# Altium PCB roneCPUBoard-v8.PcbDoc (part 1 of 3)
Units mil, origin at the board's own origin, x right, y up, seen from the top; angles counter-clockwise.
Board outline 3919.58 x 3919.51 mil, 2 copper layers (Top Layer, Bottom Layer); 146 components, 122 nets, 569 pads, 329 vias.
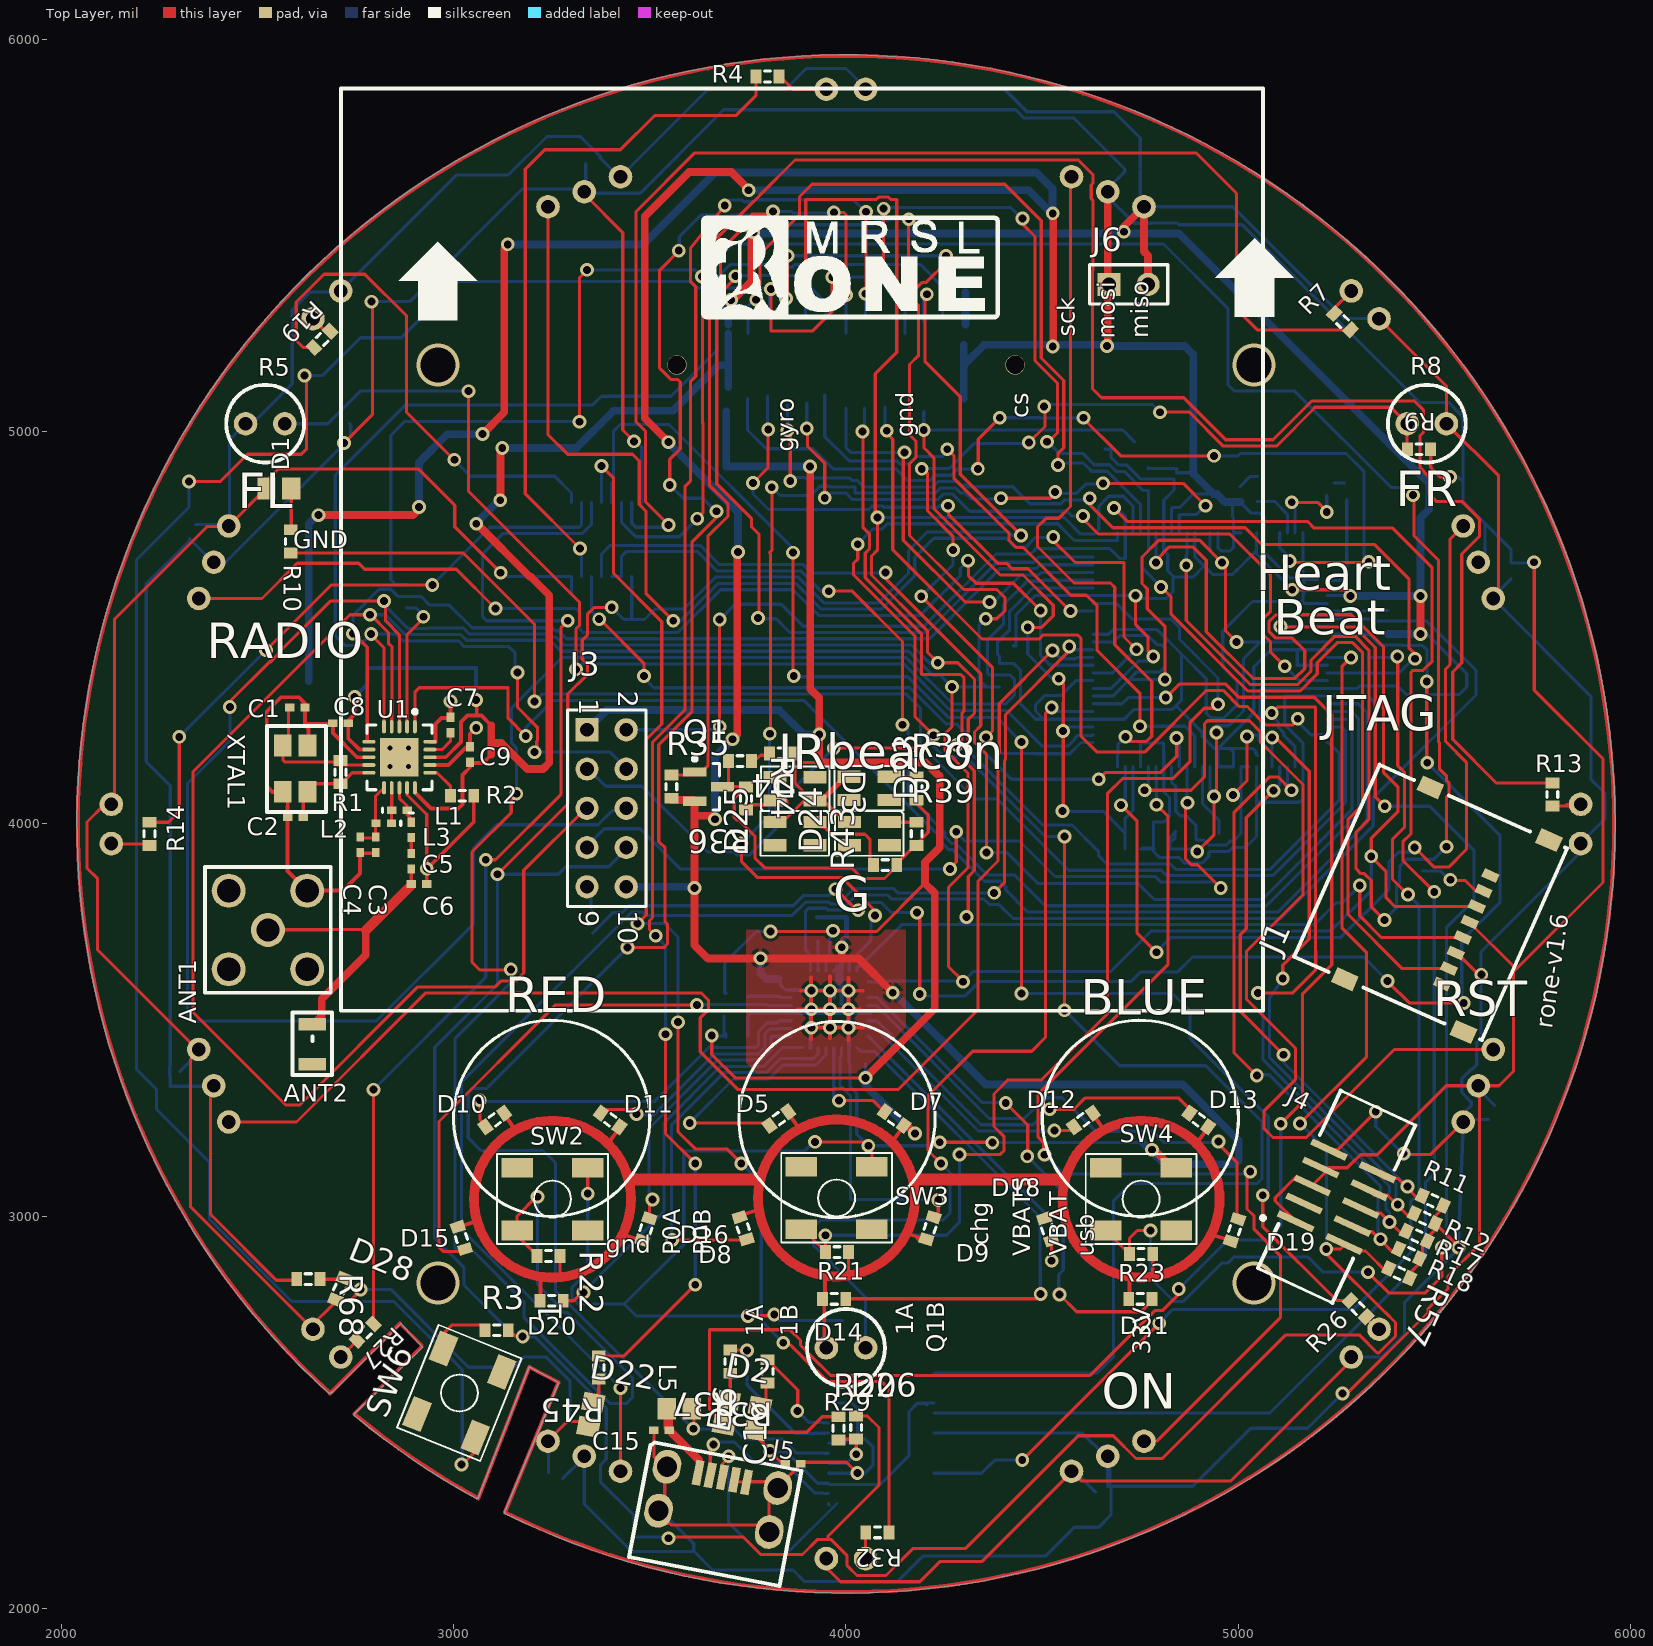
[diagram p0: Top Layer view]
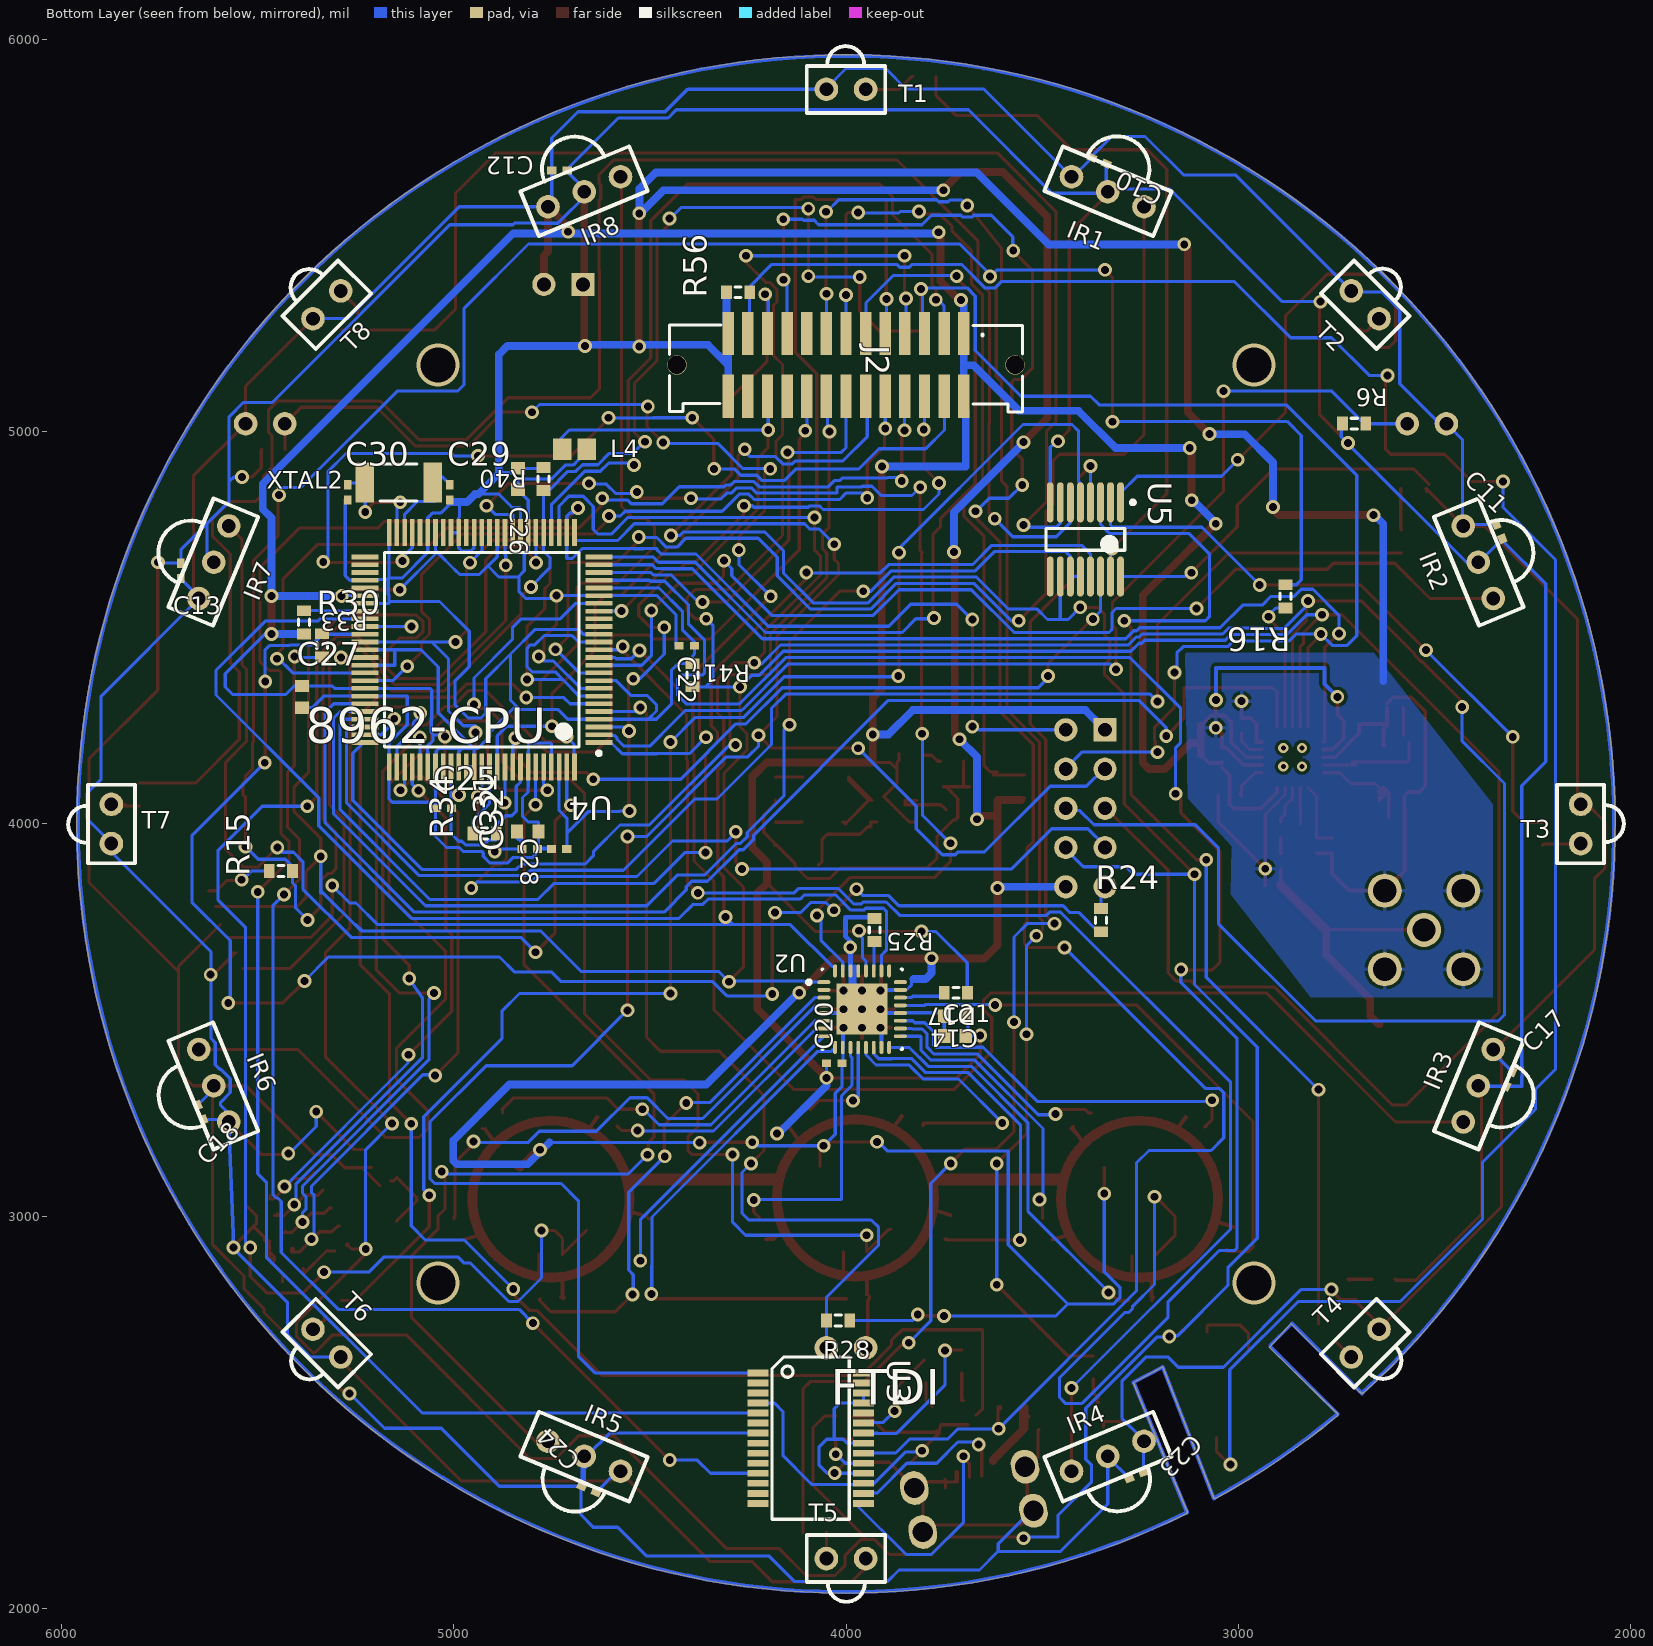
[diagram p1: Bottom Layer view, seen from below]

## Layer stack, top to bottom
Top Layer: signal copper 1.4
Dielectric: dielectric 12.6, FR-4, Dk 4.8
Bottom Layer: signal copper 1.4

## Board outline
2748.8,2491.14 cw(c2752,2495) 2750.05,2499.62 cw(c2754.57,2497.44) 2751.08,2501.04 2921.02,2666.21 2865.87,2726.78 2693.05,2553.95 cw(c2689.5,2557.5) 2689.65,2552.49 cw(c2684.81,2553.79) 2681.44,2550.08 cw(c4000,4000) 5959.81,4000 cw(c4000,4000) 3132.78,2242.5 cw(c3135,2247) 3131.48,2250.58 3267.62,2576.73 3192.75,2616.8 3064.33,2286.32 cw(c3059.66,2288.13) 3064.09,2285.79 cw(c3059.09,2286.17) 3056.68,2281.77 cw(c4000,4000)

## Design rules (kind name [scope] priority, off if disabled: settings)
Clearance [All] p1: gap=8
PolygonConnect [All] p1: connectstyle=Relief reliefconductorwidth=10 reliefentries=4 polygonreliefangle="90 Angle"
RoomDefinition SoundChip-ProtoHeader [InComponentClass('SoundChip-ProtoHeader')] p1: confinementstyle=ConfineIn formatcopy=TRUE lockcomponents=FALSE outline 6005,2266 6223,2266 6223,3027 6005,3027
RoomDefinition LightSensorsButtons [InComponentClass('LightSensorsButtons')] p2: confinementstyle=ConfineIn formatcopy=TRUE lockcomponents=FALSE outline 0,0 2000,0 2000,1000 0,1000
RoomDefinition USB_Headers [InComponentClass('USB_Headers')] p3: confinementstyle=ConfineIn formatcopy=TRUE lockcomponents=FALSE outline 6005,1995 6426,1995 6426,2205 6005,2205
RoomDefinition Radio [InComponentClass('Radio')] p4: confinementstyle=ConfineIn formatcopy=TRUE lockcomponents=FALSE outline 0,0 2000,0 2000,1000 0,1000
RoomDefinition LEDs [InComponentClass('LEDs')] p5: confinementstyle=ConfineIn formatcopy=TRUE lockcomponents=FALSE outline 0,0 2000,0 2000,1000 0,1000
RoomDefinition IRComms [InComponentClass('IRComms')] p6: confinementstyle=ConfineIn formatcopy=TRUE lockcomponents=FALSE outline 0,0 2000,0 2000,1000 0,1000
RoomDefinition CPU [InComponentClass('CPU')] p7: confinementstyle=ConfineIn formatcopy=TRUE lockcomponents=FALSE outline 6005,2000 6196,2000 6196,2186 6005,2186
RoutingVias [All] p1: holewidth=20 width=35 viastyle="Through Hole" minholewidth=20 minwidth=35 maxholewidth=20 maxwidth=35
SMDNeckDown [All] p1: percent=400.000
SilkscreenOverComponentPads [All] p1: minsilkscreentomaskgap=10
SolderMaskExpansion [All] p1: expansion=4
Width "Schematic Width Constraint_5" [InNet('NetC15_2')] p1: maxlimit=20 minlimit=10 preferedwidth=10 minimp=50.000000 maximp=50.000000 favimp=50.000000
Width [All] p2: maxlimit=8 minlimit=8 preferedwidth=8
27 further rules are at their usual default settings.

## Classes and differential pairs
component class USB_Headers: C15 C16 D2 D6 D22 D26 J1 J2 J5 L5 Q? R20 R31 R37 R45 U3 VDDC
component class LightSensorsButtons: R5 R6 R8 R9 R21 R22 R23 R28 R29 SW2 SW3 SW4
component class IRComms: C10 C11 C12 C13 C17 C18 C23 C24 D3 D4 D23 D24 D25 IR1 IR2 IR3 IR4 IR5 IR6 IR7 IR8 Q1 R4 R7 R13 R14 R19 R26 R27 R32 R35 R36 R38 R39 R43 R44 T1 T2 T3 T4 T5 T6 T7 T8 U5 U9 U10
component class CPU: C22 C25 C26 C27 C28 C29 C30 C31 C32 D1 D28 D? I2C IR_BEACON J4 J6 L4 "LED1 Power" "LED2 USB" "LED-H Blinky" LEDs R3 R10 R11 R12 R15 R16 R17 R18 R24 R30 R33 R34 R40 R41 R56 R57 R68 R? RST SPI SW6 SW? SW_RED U0 U4 XTAL2 "XTAL 1"
component class LEDs: C14 C20 C21 D5 D7 D8 D9 D10 D11 D12 D13 D14 D15 D16 D17 D18 D19 D20 D21 R25 TP? U2
component class Radio: ANT1 Ant1 ANT2 C1 C2 C3 C4 C5 C6 C7 C8 C9 C? L1 L2 L3 R1 R2 U1 XTAL1
component class SoundChip-ProtoHeader: J3

## Components (designator, comment, footprint, x,y, rotation, side; value= is the part's Value field where it differs from the comment)
ANT1 "Ant" AntennaSMA 2527,3730 r90 top
ANT2 "Antenna" antenna 2640,3490 r0 top
C1 "Cap Semi" CAPC1005L 2602,4297 r180 top
C2 "Cap Semi" CAPC1005L 2597,4017 r0 top
C3 "Cap Semi" CAPC1005L 2802,3947 r90 top
C4 "Cap Semi" CAPC1005L 2762,3947 r90 top
C5 "Cap Semi" CAPC1005L 2892,3905 r90 top
C6 "Cap Semi" CAPC1005L 2912,3847 r180 top
C7 "Cap Semi" CAPC1005L 2992,4252 r270 top
C8 "Cap Semi" CAPC1005L 2712,4257 r0 top
C9 "Cap Semi" CAPC1005L 3042,4177 r270 top
C10 "Cap Semi" CAPC1005L 3355,5690 r22.5 bottom
C11 "Cap Semi" CAPC1005L 2335,4745 r67.5 bottom
C12 "Cap Semi" CAPC1005L 4730,5665 r0 bottom
C13 "Cap Semi" CAPC1005L 5695,4645 r270 bottom
C14 "Cap Semi" CAPC1608L 3722,3510 r180 bottom
C15 "" CAPC1005L 3530,2455 r0 top
C16 "" CAPC1005L 3865,2370 r180 top
C17 "Cap Semi" CAPC1005L 2310,3350 r112.5 bottom
C18 "Cap Semi" CAPC1005L 5645,3265 r247.5 bottom
C20 "Cap Semi" CAPC1005L 4030,3390 r0 bottom
C21 "Cap Semi" CAPC1608L 3722,3460 r180 bottom
C22 "Cap Semi" CAPC1005L 4406,4454 r0 bottom
C23 "Cap Semi" CAPC1005L 3260,2340 r157.5 bottom
C24 "Cap Semi" CAPC1005L 4655,2305 r202.5 bottom
C25 "Cap Semi" CAPC1005L 5025,4040 r180 bottom
C26 "Cap Semi" CAPC1608L 4836,4879 r270 bottom
C27 "Cap Semi" CAPC1608L 5386,4324 r90 bottom
C28 "Cap Semi" CAPC1005L 4731,3936 r180 bottom
C29 "Cap Semi" CAPC1005L 5010,4845 r90 bottom
C30 "Cap Semi" CAPC1005L 5270,4845 r90 bottom
C31 "Cap Semi" CAPC1608L 4811,3981 r0 bottom
C32 "Cap Semi" CAPC1005L 4806,3936 r0 bottom
D1 "heartbeat(white)" INDC2012L 2555,4855 r0 top
D2 "RXLED" INDC2012L 3695,2500 r79.1 top
D3 "IRBeacon" IRBeacon 3870,4090 r270 top
D4 "BEACON_PILOT" SurfaceMount(603) 3835,4180 r180 top
D5 "green" SurfaceMount(603) 3829,3249 r216 top
D6 "TXLED" INDC2012L 3775,2485 r79.1 top
D7 "green" SurfaceMount(603) 4123,3249 r144 top
D8 "green" SurfaceMount(603) 3738,2970 r288 top
D9 "green" SurfaceMount(603) 4214,2970 r72 top
D10 "red" SurfaceMount(603) 3105,3246 r216 top
D11 "red" SurfaceMount(603) 3399,3246 r144 top
D12 "blue" SurfaceMount(603) 4605,3246 r216 top
D13 "blue" SurfaceMount(603) 4899,3246 r144 top
D14 "green" SurfaceMount(603) 3970,2790 r0 top
D15 "red" SurfaceMount(603) 3020,2945 r288 top
D16 "red" SurfaceMount(603) 3490,2967 r72 top
D17 "extra" SurfaceMount(603) 3720,3570 r0 bottom
D18 "blue" SurfaceMount(603) 4514,2967 r288 top
D19 "blue" SurfaceMount(603) 4990,2965 r72 top
D20 "red" SurfaceMount(603) 3250,2785 r0 top
D21 "blue" SurfaceMount(603) 4750,2790 r0 top
D22 "Charge" INDC2012L 3350,2495 r79.1 top
D23 "IRBeacon" IRBeacon 4059,4090 r90 top
D24 "IRBeacon" IRBeacon 4060,3975 r90 top
D25 "IRBeacon" IRBeacon 3870,3975 r90 top
D26 "DIODE" SurfaceMount(603) 4026,2462 r90 top
D28 "LED" SurfaceMount(603) 2710,2815 r68 top
IR1 "GP1UX31QS" GP1UX31QS 3333,5611 r292.5 bottom
IR2 "GP1UX31QS" GP1UX31QS 2389,4667 r337.5 bottom
IR3 "GP1UX31QS" GP1UX31QS 2389,3333 r22.5 bottom
IR4 "GP1UX31QS" GP1UX31QS 3333,2389 r67.5 bottom
IR5 "GP1UX31QS" GP1UX31QS 4667,2389 r112.5 bottom
IR6 "GP1UX31QS" GP1UX31QS 5611,3333 r157.5 bottom
IR7 "GP1UX31QS" GP1UX31QS 5611,4667 r202.5 bottom
IR8 "GP1UX31QS" GP1UX31QS 4667,5611 r247.5 bottom
J1 "Micro_SD" MICRO_SD 5490,3800 r66 top
J2 "HCOMM/MOT" "HeaderSM 13x2" 4000,5170 r270 bottom locked
J3 "sound chip header" HDR2X5 3340,4240 r270 top
J4 "JTAG" JTAG-10 5250,3050 r245 top
J5 "USB" "USB Minib (thru-hole)" 3685,2335 r79.1 top
J6 "Header 2" HDR1X2 4670,5375 r0 top
L1 "Inductor" INDC1005AL 2862,4035 r0 top
L2 "Inductor" INDC1005AL 2822,4002 r180 top
L3 "Inductor" INDC1005AL 2892,3985 r270 top
L4 "Inductor" INDC2012L 4692,4955 r180 bottom
L5 "Inductor" INDC2012L 3575,2510 r0 top
Q1 "Mosfet" SOT-23 3650,4095 r0 top
R1 "Res3" RESC1608L 2712,4132 r270 top
R2 "Res3" RESC1608L 3022,4072 r180 top
R3 "Res3" RESC1608L 3110,2710 r0 top
R4 "Res3" RESC1608L 3800,5905 r180 top
R5 "photoresistor" photoresistor 2520,5020 r270 top
R6 "Res3" RESC1608L 2705,5020 r0 bottom
R7 "Res3" RESC1608L 5265,5280 r315 top
R8 "photoresistor" photoresistor 5480,5020 r90 top
R9 "Res3" RESC1608L 5460,4955 r0 top
R10 "Res3" RESC1608L 2585,4720 r90 top
R11 "Res3" RESC1608L 5495,3040 r335 top
R12 "Res3" RESC1608L 5475,2995 r335 top
R13 "Res3" RESC1608L 5800,4075 r90 top
R14 "Res3" RESC1608L 2225,3975 r90 top
R15 "Res3" RESC1608L 5440,3880 r0 bottom
R16 "Res3" RESC1608L 2880,4580 r270 bottom
R17 "Res3" RESC1608L 5455,2950 r335 top
R18 "Res3" RESC1608L 5435,2905 r335 top
R19 "Res3" RESC1608L 2665,5235 r225 top
R20 "Res3" RESC1608L 3981,2460 r270 top
R21 "Res3" RESC1608L 3977,2909 r0 top
R22 "Res3" RESC1608L 3242,2899 r0 top
R23 "Res3" RESC1608L 4752,2904 r0 top
R24 "Res3" RESC1608L 3350,3755 r90 bottom
R25 "Res3" RESC1608L 3927,3730 r270 bottom
R26 "Res3" RESC1608L 5305,2765 r135 top
R27 "Res3" RESC1608L 2775,2705 r45 top
R28 "Res3" RESC1608L 4020,2735 r180 bottom
R29 "photoresistor" photoresistor 4000,2665 r270 top
R30 "" RESC1608L 5335,4455 r270 bottom
R31 "" RESC1608L 3800,2605 r270 top
R32 "Res3" RESC1608L 4080,2195 r0 top
R33 "Res3" RESC1608L 5381,4514 r270 bottom
R34 "Res3" RESC1608L 4921,3976 r0 bottom
R35 "Res3" RESC1608L 3555,4095 r90 top
R36 "Res3" RESC1608L 3745,4065 r270 top
R37 "" RESC1608L 3705,2630 r270 top
R38 "Res3" RESC1608L 4180,4090 r90 top
R39 "Res3" RESC1608L 4180,3975 r90 top
R40 "Res3" RESC1608L 4771,4879 r270 bottom
R41 "Res3" RESC1608L 4391,4379 r270 bottom
R43 "Res3" RESC1608L 4100,3895 r180 top
R44 "Res3" RESC1608L 3730,4160 r0 top
R45 "Res3" RESC1608L 3370,2615 r270 top
R56 "Res3" RESC1608L 4275,5355 r0 bottom
R57 "Res3" RESC1608L 5410,2855 r335 top
R68 "Res3" RESC1608L 2630,2840 r0 top
SW2 "SW_RED" SwitchTall-TL330 3252,3044 r0 top
SW3 "SW_GREEN" SwitchTall-TL330 3976,3047 r0 top
SW4 "SW_BLUE" SwitchTall-TL330 4752,3044 r0 top
SW6 "PWR_BUTTON" SwitchTall-TL330 3015,2550 r68 top
T1 "LN54" LN54 4000,5872 r270 bottom
T2 "LN54" LN54 2677,5323 r315 bottom
T3 "LN54" LN54 2128,4000 r0 bottom
T4 "LN54" LN54 2677,2677 r45 bottom
T5 "LN54" LN54 4000,2128 r90 bottom
T6 "LN54" LN54 5323,2677 r135 bottom
T7 "LN54" LN54 5872,4000 r180 bottom locked
T8 "LN54" LN54 5323,5323 r225 bottom
U1 "nRF24L01P" QFN-20 2862,4170 r270 top
U2 "Allegro6285" QFN-32 3959,3528 r180 bottom
U3 "FT232RL" SSOP-28 4090,2435 r270 bottom locked
U4 "LM3S8962" LQFP-100 4928,4444 r0 bottom locked
U5 "SN74AHCT595" TSOP65P640X120-16N 3390,4725 r270 bottom
XTAL1 "RADIO CRYSTAL" RadioCrystal 2565,4200 r270 top
XTAL2 "8 MHz" RESC5025L 5140,4870 r0 bottom

## Footprints (in the part's own frame and the unit in brackets; to place one, negate y for a bottom-side part, rotate by r counter-clockwise, add the part's x,y. Pads: shape width x height; smd on the part's side, far side on the other; paste and mask are expansions set on the pad)
antenna [mm] "Radio Antenna"
  rect 1.8x0.8 smd: 1(0,0) 2(0,-2.6)
  silkscreen extent -1.27,-3.3 1.27,0.76
AntennaSMA [mm] "antenna for radios , tyco 108-11200"
  round 2.2 hole 1.511: 1(0,0) 2(-2.54,2.54) 3(2.54,2.54) 4(2.54,-2.54) 5(-2.54,-2.54)
  silkscreen extent -4.06,-4.06 4.06,4.06
CAPC1005L [mm] "Chip Capacitor, Body 1.0x0.5mm, IPC High Density"
  rect 0.6x0.5 smd: 1(-0.5,0) 2(0.5,0)
  body extent -0.55,-0.3 0.55,0.3, height 1.3
CAPC1608L [mm] "Chip Capacitor, Body 1.6x0.8mm, IPC High Density"
  rect 0.8x0.9 smd: 1(-0.7,0) 2(0.7,0)
  body extent -0.87,-0.48 0.87,0.48, height 1.3
GP1UX31QS [mil]
  round 60 hole 35: 1(0,100) 2(0,0) 3(0,-100)
  silkscreen extent -146,-150 60,150
HDR1X2 [mm] "Connector; Header; 2 Position"
  rect 1.5x1.5 hole 0.9: 1(0,0)
  round 1.5 hole 0.9: 2(2.54,0)
  silkscreen extent -1.27,-1.27 3.81,1.27
HDR2X5 [mm] "Connector; Header; 5x2 Position"
  rect 1.5x1.5 hole 0.9: 1(0,0)
  round 1.5 hole 0.9: 2(0,2.54) 3(2.54,0) 4(2.54,2.54) 5(5.08,0) 6(5.08,2.54) 7(7.62,0) 8(7.62,2.54) 9(10.16,0) 10(10.16,2.54)
  silkscreen extent -1.27,-1.27 11.43,3.81
"HeaderSM 13x2" [mm]
  rect 2.795x0.74 smd: 1(-2.033,7.62) 2(2.033,7.62) 3(-2.033,6.35) 4(2.033,6.35) 5(-2.033,5.08) 6(2.033,5.08) 7(-2.033,3.81) 8(2.033,3.81) 9(-2.033,2.54) 10(2.033,2.54) 11(-2.033,1.27) 12(2.033,1.27) 13(-2.033,0) 14(2.033,0) 15(-2.033,-1.27) 16(2.033,-1.27) 17(-2.033,-2.54) 18(2.033,-2.54) 19(-2.033,-3.81) 20(2.033,-3.81) 21(-2.033,-5.08) 22(2.033,-5.08) 23(-2.033,-6.35) 24(2.033,-6.35) 25(-2.033,-7.62) 26(2.033,-7.62)
  round 1.27 hole 1.19: c1(0,10.948) c2(0,-10.948)
  silkscreen extent -2.59,-11.43 3.06,11.43
INDC1005AL [mm] "Chip Inductor, Body 1.0x0.5mm, IPC High Density"
  rect 0.6x0.5 smd: 1(-0.5,0) 2(0.5,0)
  silkscreen extent -1.1,-0.15 -1.1,0.15, body extent -0.55,-0.3 0.55,0.3, height 0.55
INDC2012L [mm] "Chip Inductor, Body 2.0x1.2mm, IPC High Density"
  rect 1.2x1.4 smd: 1(-0.8,0) 2(0.8,0)
  body extent -1.1,-0.7 1.1,0.7, height 0.55
IRBeacon [mm]
  rect 0.8x1.5 smd: 1(-0.738,1.3) 2(0.762,-1.3) 3(-0.738,-1.3) 4(0.762,1.3)
  silkscreen extent -1.42,-2.21 1.46,2.24
JTAG-10 [mm] "Connector, Socket Strip, Double Row, SMT, 20 Position, Vertical, Pitch 2mm, Body 20 x 4 mm (LxW)"
  rect 0.44x2.5 smd: 1(-2.56,-1.73) 2(-2.56,1.73) 3(-1.28,-1.73) 4(-1.28,1.73) 5(0,-1.73) 6(0,1.73) 7(1.28,-1.73) 8(1.28,1.73) 9(2.56,-1.73) 10(2.56,1.73)
  silkscreen extent -6.35,-3.86 6.35,2.67, body extent -6.35,-2.01 6.35,2.03, height 3.56
LN54 [mil]
  round 60 hole 35: 1(0,50) 2(0,-50)
  silkscreen extent -110,-100 60,100
LQFP-100 [mm] "100-Pin LQFP Package"
  rect 1.75x0.3 smd: 1(-7.575,6) 2(-7.575,5.5) 3(-7.575,5) 4(-7.575,4.5) 5(-7.575,4) 6(-7.575,3.5) 7(-7.575,3) 8(-7.575,2.5) 9(-7.575,2) 10(-7.575,1.5) 11(-7.575,1) 12(-7.575,0.5) 13(-7.575,0) 14(-7.575,-0.5) 15(-7.575,-1) 16(-7.575,-1.5) 17(-7.575,-2) 18(-7.575,-2.5) 19(-7.575,-3) 20(-7.575,-3.5) 21(-7.575,-4) 22(-7.575,-4.5) 23(-7.575,-5) 24(-7.575,-5.5) 25(-7.575,-6) 51(7.575,-6) 52(7.575,-5.5) 53(7.575,-5) 54(7.575,-4.5) 55(7.575,-4) 56(7.575,-3.5) 57(7.575,-3) 58(7.575,-2.5) 59(7.575,-2) 60(7.575,-1.5) 61(7.575,-1) 62(7.575,-0.5) 63(7.575,0) 64(7.575,0.5) 65(7.575,1) 66(7.575,1.5) 67(7.575,2) 68(7.575,2.5) 69(7.575,3) 70(7.575,3.5) 71(7.575,4) 72(7.575,4.5) 73(7.575,5) 74(7.575,5.5) 75(7.575,6)
  rect 0.3x1.75 smd: 26(-6,-7.575) 27(-5.5,-7.575) 28(-5,-7.575) 29(-4.5,-7.575) 30(-4,-7.575) 31(-3.5,-7.575) 32(-3,-7.575) 33(-2.5,-7.575) 34(-2,-7.575) 35(-1.5,-7.575) 36(-1,-7.575) 37(-0.5,-7.575) 38(0,-7.575) 39(0.5,-7.575) 40(1,-7.575) 41(1.5,-7.575) 42(2,-7.575) 43(2.5,-7.575) 44(3,-7.575) 45(3.5,-7.575) 46(4,-7.575) 47(4.5,-7.575) 48(5,-7.575) 49(5.5,-7.575) 50(6,-7.575) 76(6,7.575) 77(5.5,7.575) 78(5,7.575) 79(4.5,7.575) 80(4,7.575) 81(3.5,7.575) 82(3,7.575) 83(2.5,7.575) 84(2,7.575) 85(1.5,7.575) 86(1,7.575) 87(0.5,7.575) 88(0,7.575) 89(-0.5,7.575) 90(-1,7.575) 91(-1.5,7.575) 92(-2,7.575) 93(-2.5,7.575) 94(-3,7.575) 95(-3.5,7.575) 96(-4,7.575) 97(-4.5,7.575) 98(-5,7.575) 99(-5.5,7.575) 100(-6,7.575)
  silkscreen extent -7.7,-6.3 6.3,6.82, body extent -7,-7 7,7, height 1.6
MICRO_SD [mm]
  rect 0.6x1.05 smd: 1(3.17,-2.82) 2(2.07,-2.82) 3(0.97,-2.82) 4(-0.13,-2.82) 5(-1.23,-2.82) 6(-2.33,-2.82) 7(-3.43,-2.82) 8(-4.53,-2.82)
  rect 1.05x1.5 smd: ""(-6.8,-5.35) ""(-6.8,3.05) ""(6.8,-5.35) ""(6.8,3.05)
  silkscreen extent -6.8,-6.65 6.8,6.65
photoresistor [mil]
  round 60 hole 35: 1(0,50) 2(0,-50)
  silkscreen extent -99,-99 99,99
QFN-20 [mm] "QFN, 20-Leads, Body 4.2x4.2mm (max), Pitch 0.50mm, IPC Medium Density"
  oval 0.85x0.25 smd: 1(-1.975,1) 2(-1.975,0.5) 3(-1.975,0) 4(-1.975,-0.5) 5(-1.975,-1) 11(1.975,-1) 12(1.975,-0.5) 13(1.975,0) 14(1.975,0.5) 15(1.975,1)
  oval 0.25x0.85 smd: 6(-1,-1.975) 7(-0.5,-1.975) 8(0,-1.975) 9(0.5,-1.975) 10(1,-1.975) 16(1,1.975) 17(0.5,1.975) 18(0,1.975) 19(-0.5,1.975) 20(-1,1.975)
  rect 2.5x2.5 smd: 21(0,0)
  silkscreen extent -3.07,-2.1 2.1,2.1, body extent -2.07,-2.07 2.07,2.07, height 0.8
QFN-32 [mm] "QFN, 32-Leads, Body 5.2x5.2mm (max), Pitch 0.50mm, IPC Medium Density"
  oval 0.85x0.25 smd: 1(-2.475,1.75) 2(-2.475,1.25) 3(-2.475,0.75) 4(-2.475,0.25) 5(-2.475,-0.25) 6(-2.475,-0.75) 7(-2.475,-1.25) 8(-2.475,-1.75) 17(2.475,-1.75) 18(2.475,-1.25) 19(2.475,-0.75) 20(2.475,-0.25) 21(2.475,0.25) 22(2.475,0.75) 23(2.475,1.25) 24(2.475,1.75)
  oval 0.25x0.85 smd: 9(-1.75,-2.475) 10(-1.25,-2.475) 11(-0.75,-2.475) 12(-0.25,-2.475) 13(0.25,-2.475) 14(0.75,-2.475) 15(1.25,-2.475) 16(1.75,-2.475) 25(1.75,2.475) 26(1.25,2.475) 27(0.75,2.475) 28(0.25,2.475) 29(-0.25,2.475) 30(-0.75,2.475) 31(-1.25,2.475) 32(-1.75,2.475)
  rect 3.3x3.3 smd: 33(0,0)
  silkscreen extent -3.57,-2.6 2.6,2.6, body extent -2.57,-2.58 2.58,2.57, height 1
RadioCrystal [mm] "Crystal for radio"
  rect 1.4x1.15 smd: 1(0,0) 2(3,0) 3(3,1.6) 4(0,1.6)
  silkscreen extent -1.27,-1.02 4.32,2.79
RESC1608L [mm] "Chip Resistor, Body 1.6x0.8mm, IPC High Density"
  rect 0.7x0.9 smd: 1(-0.75,0) 2(0.75,0)
  silkscreen extent -0.2,-0.35 0.2,0.35, body extent -0.85,-0.48 0.85,0.48, height 0.9
RESC5025L [mm] "Chip Resistor, Body 5.0x2.5mm, IPC High Density"
  rect 1.2x2.6 smd: 1(-2.2,0) 2(2.2,0)
  silkscreen extent -1.2,-1.2 1.2,1.2, body extent -2.58,-1.33 2.58,1.33, height 0.9
SOT-23 [mm] "SOT23, 3-Leads, Body 3.0x2.5mm (max), Pitch 0.95mm, IPC Medium Density"
  rect 1.5x0.6 smd: 1(-0.9,0.95) 2(-0.9,-0.95) 3(0.9,0)
  silkscreen extent -1.02,-1.5 0.7,1.92, body extent -0.7,-1.5 0.7,1.5, height 1.2
SSOP-28 [mm]
  rect 0.44x1.37 smd: 1(-4.225,-3.415) 2(-3.575,-3.415) 3(-2.925,-3.415) 4(-2.275,-3.415) 5(-1.625,-3.415) 6(-0.975,-3.415) 7(-0.325,-3.415) 8(0.325,-3.415) 9(0.975,-3.415) 10(1.625,-3.415) 11(2.275,-3.415) 12(2.925,-3.415) 13(3.575,-3.415) 14(4.225,-3.415) 15(4.225,3.415) 16(3.575,3.415) 17(2.925,3.415) 18(2.275,3.415) 19(1.625,3.415) 20(0.975,3.415) 21(0.325,3.415) 22(-0.325,3.415) 23(-0.975,3.415) 24(-1.625,3.415) 25(-2.275,3.415) 26(-2.925,3.415) 27(-3.575,3.415) 28(-4.225,3.415)
  silkscreen extent -5.25,-2.5 5.25,2.5
SurfaceMount(603) [mm]
  rect 0.7x0.9 smd: 1(-0.75,0) 2(0.75,0)
  silkscreen extent -0.2,-0.35 0.2,0.35, body extent -0.85,-0.48 0.85,0.48, height 0.9
SwitchTall-TL330 [mil] "Small SMDTall Tact Switch E-Switch TL330"
  rect 80x50 smd: 1(-90,80) 2(90,80) 3(-90,-80) 4(90,-80)
  silkscreen extent -141,-114 141,115
TSOP65P640X120-16N [mm] "TSOP, 16-Leads, Body 5.1x4.5mm (max), Pitch 0.65mm, IPC Medium Density"
  oval 2.6x0.445 smd: 1(-2.4,2.275) 2(-2.4,1.625) 3(-2.4,0.975) 4(-2.4,0.325) 5(-2.4,-0.325) 6(-2.4,-0.975) 7(-2.4,-1.625) 8(-2.4,-2.275) 9(2.4,-2.275) 10(2.4,-1.625) 11(2.4,-0.975) 12(2.4,-0.325) 13(2.4,0.325) 14(2.4,0.975) 15(2.4,1.625) 16(2.4,2.275)
  silkscreen extent -2.52,-2.55 0.7,3.2, body extent -2.25,-2.55 2.25,2.55, height 1.2
"USB Minib (thru-hole)" [mm]
  rect 1.65x0.55 smd: 1(0,1.6) 2(0,0.8) 3(0,0) 4(0,-0.8) 5(0,-1.6)
  oval 2.2x1.8 hole 1.321: 6(0,3.65) 7(-2.9,3.65) 8(-2.9,-3.65) 9(0,-3.65)
  silkscreen extent -6.2,-4.95 1.39,4.95

## Part data
ANT1: library part AntennaConn
C1 C2 C3 C4 C5 C6 C7 C8 C9 C10 C11 C12 C13 C14 C17 C18 C20 C21 C22 C23 C24 C25 C26 C27 C28 C29 C30 C31 C32: "Capacitor (Semiconductor SIM Model)"
C15 C16: library part Cap, "Capacitor"
D1 D2 D6 D22: library part LED2, "Typical RED, GREEN, YELLOW, AMBER GaAs LED"
D4 D5 D7 D8 D9 D10 D11 D12 D13 D14 D15 D16 D17 D18 D19 D20 D21: library part LED
J1: library part MICRO_SD
J2: library part HCOMM/HMOT, "Header, 2X20, 50mil, IDC"
J3: library part "Header 5X2", "Header, 5-Pin, Dual row"
J4: library part "Header 5X2H", "Header, 5-Pin, Dual row, Right Angle"
J5: library part USB-ConnTH
J6: "Header, 2-Pin"
R1 R2 R3 R4 R6 R7 R9 R10 R11 R12 R13 R14 R15 R16 R17 R18 R19 R20 R21 R22 R23 R24 R25 R26 R27 R28 R32 R33 R34 R35 R36 R38 R39 R40 R41 R43 R44 R45 R56 R57 R68: "Resistor"
R30 R31 R37: library part Res1, "Resistor"
SW2 SW3 SW4 SW6: library part Switch-TL330
U1: library part radio-nRF24L01P
U5: library part SN74AHCT595_Shift_Register
XTAL1: library part RadioCrystal
XTAL2: library part XTAL, "Crystal Oscillator"

## Via types
v1: diameter 35, hole 20, Top Layer to Bottom Layer, 321 vias
v2: diameter 25.98, hole 12.99, Top Layer to Bottom Layer, tented top, 4 vias
v3: diameter 110, hole 89, Top Layer to Bottom Layer, 4 vias

## Nets (pads, with @x,y where several pads share a name; then routed paths per layer and width w, separated by ;. In a path a pad name is that pad's centre, name@x,y a point inside that pad or via, vN(x,y) a via of type N, cw(c..) or ccw(c..) an arc to the next point about the centre after c; other vN are vias at no path point)
3.3V: C8.2 C9.2 C10.2 C11.2 C12.2 C13.2 C14.2 C17.2 C18.2 C20.2 C21.2 C22.2 C23.2 C24.2 C25.2 C26.2 C27.2 D1.1 D3.4 D4.1 D5.1 D7.1 D8.1 D9.1 D10.1 D11.1 D12.1 D13.1 D14.1 D15.1 D16.1 D17.1 D18.1 D19.1 D20.1 D21.1 D22.1 D23.4 D24.4 D25.4 D28.1 IR1.3 IR2.3 IR3.3 IR4.3 IR5.3 IR6.3 IR7.3 IR8.3 J1.6 J2.1 J2.2 J3.1 J4.1 J6.2 L4.2 R5.2 R8.2 R11.2 R12.2 R17.2 R18.2 R21.2 R22.2 R23.2 R29.2 R33.2 R34.1 R57.2 T1.2 T2.2 T3.2 T4.2 T5.2 T6.2 T7.2 T8.2 U1.7 U1.15 U1.18 U2.28 U4.8 U4.20 U4.32 U4.36 U4.44 U4.56 U4.68 U4.81 U4.83 U4.84 U4.93 U5.16 | length 70377.1
  Top Layer w8: IR3.3@2341,3425 IR3.3@2345,3429 ; IR3.3@2344,3428 2093,3679 2093,3860 2066,3887 2066,4005 2111,4050 2136,4050 2136,4522 2372,4758 IR2.3@2423,4758 ; IR3.3@2351,3422 2330,3401 2330,3024 2635.5,2718.5 2698.14,2781.14 D28.1@2710.42,2781.14 ; IR2.3@2427.27,4759.39 D1.1@2518,4850.12 ; IR2.3@2427.27,4762 IR2.3@2428,4762 ; D1.1@2514,4865 2554,4905 2910,4905 3003,4812 3003,4757 v1(3120,4640) ; D1.1@2520,4848 2520,4855 D1.1@2523.5,4855 ; D28.1@2698.94,2787.62 2739.62,2787.62 v1@2764,2812 ; D20.1@3217,2794 D20.1@3220.47,2790.53 ; D20.1@3220.47,2785 D20.1@3220.47,2790.53 ; 3220.47,2816 D20.1@3220.47,2790.53 ; 3225,4140 3228,4140 3229,4140 ; IR4.3@3246,2434 3289,2477 3344.04,2477 D22.1@3344.04,2464.07 ; 3271.53,2844.47 R22.2@3271.53,2899 3271.53,2867.06 ; 3408,3205 3427,3224 3423.71,3223.48 3420.02,3222.89 3420.02,3228.64 D11.1@3422.89,3228.64 ; 3452,3044 3452,3094 ; 3488,3094 3776,3094 ; v1(3658,3461) 3658,3412.63 3717.63,3353 v1(4049.69,3353) ; v1(3807.69,3726) 4078,3726 4200.99,3849.01 ; D25.4@3818.82,4005 3839,4005 D3.4@3902,4068 ; D4.1@3864.53,4180 3864.53,4162.47 3870,4157 3870,4139 ; D3.4@3904,4070 3870,4104 3870,4139 ; 3932,4157 3888,4157 3870,4139 ; D3.4@3934,4060 3993,4119 3993,4111 3942,4060 4002,4000 4000,4000 4000,4005 D24.4@4008.82,4005 ; D14.1@3941,2797 3940.47,2796.47 D14.1@3940.47,2790 3944.47,2786 3944.47,2670.53 3950,2670.53 R29.2@3950,2665 ; T5.2@3945,2128 3936,2119 3986,2069 4188,2069 4240,2121 4347,2121 ; 3997.47,2853.47 4006.53,2853.47 ; 4006.53,2854.53 R21.2@4006.53,2909 ; 4072,2871 4127,2926 ; 4143,2941.92 4142.08,2941 ; D7.1@4151,3227 4147.71,3226.48 D7.1@4146.89,3226.35 ; D7.1@4152.36,3231.64 D7.1@4146.89,3231.64 D7.1@4146.89,3226.35 ; 4161.11,3225.89 D7.1@4146.89,3225.89 ; 4176,2949.92 4184,2941.92 D9.1@4204.87,2941.92 ; 4176,3047 4176,3094 ; 4344.88,2121 4347,2121 ; D18.1@4501.13,2993.87 D18.1@4504.87,2995.08 ; IR5.3@4574.61,2350.73 IR5.3@4575.67,2349.67 ; IR5.3@4577,2351 IR5.3@4575.67,2349.67 ; D21.1@4717,2794 D21.1@4720.47,2794 ; D21.1@4720.47,2790 D21.1@4720.47,2794 ; D21.1@4728,2794 D21.1@4720.47,2794 ; v1(4738,4581.8) 4738,4508 4770,4476 4770,4440 ; 4781.53,2847.53 R23.2@4781.53,2904 ; 4904.08,2923 4918,2936.92 ; D13.1@4927,3224 D13.1@4927.53,3224 ; v1(4986,4074) 5022,4110 v1(5022,4223) v1@5022,4225 ; v1(5137.11,4597) 5269.2,4597 v1(5285.2,4581) ; J4.1@5230.87,3170.13 5253.13,3170.13 v1(5350,3267) ; T6.2@5293,2638 4981,2326 4599.34,2326 IR5.3@4575.67,2349.67 ; T8.2@5358.36,5287.64 5530,5116 R8.2@5530,5020 ; v1@5428,3158 5490.12,3158 IR6.3@5572.73,3240.61 ; R57.2@5436,2833 5436,2846 5435,2846 5435,2854 5462.24,2881.24 5456.36,2887.12 5456.36,2897.36 5469,2910 ; R18.2@5461.76,2892.52 5469,2892.52 5469,2910 ; R12.2@5508,2972 5479,2943 5479,2942 5481.76,2942 R17.2@5481.76,2937.52 5469,2937.52 5469,2910 ; R11.2@5528.64,3027.64 5502,3001 5502,2993 5501.76,2992.76 R12.2@5501.76,2982.52 v1@5561.28,2923 ; R8.2@5530,5017 R8.2@5530,5020 ; J1.6@5554.11,3671.04 5562,3671.04 5562,3667 5561,3667 v1@5616,3612 ; IR7.3@5649.27,4574.61 IR7.3@5663,4574.61 ; IR7.3@5663,4572 IR7.3@5663,4574.61 ; 4127,2926 4127.08,2926 4142.08,2941 ; 4127,2926 4142,2941 4142.08,2941 ; D7.1@4146.89,3225.89 D7.1@4146.89,3226.35 ; D7.1@4146.89,3225.89 4144.02,3225.89 D7.1@4146.89,3226.35 ; 4347,2121 IR5.3@4575.67,2349.67 ; R8.2@5530,5020 5663,4887 IR7.3@5663,4574.61
  Top Layer w10: C8.2@2731,4262 2748,4279 v1(2748,4324) ; C8.2@2731.69,4258.31 C8.2@2731.69,4257 2731.69,4217.77 2759.77,4189.69 U1.7@2784.24,4189.69 ; U1.15@2901.37,4092.24 2901.37,4080 2942.37,4039 3012,4039 3023,4050 3023,4125 3042.5,4144.5 ; U1.18@2939.76,4170 2980.08,4170 3019,4208.92 3019,4260 3035,4276 3059,4276 ; C9.2@3042,4157.31 3042,4155.31 3075,4155.31 3096,4176.31 ; v1@3059,4316 3059,4276 ; 3096,4251 3071,4276 3059,4276
  Top Layer w20: v1@3058.5,4765.5 3194,4630 ; 3096,4176.31 3096,4206 ; 3096,4251 3096,4206 ; v1@3120,4827 3120,4955 v1@3126,4961 ; 3198,4629 3244,4583 3244,4156 3228,4140 ; 3225,4140 3188,4140 3122,4206 3096,4206 ; v1@3706,5336 3712,5336 3759,5383 v1@3759,5503 ; v1@3909,4915 3909,4344 3932,4321 v1(3932,4228) 3932,4157 4202,4157 4231.72,4127.28 ; v1(4049.69,3353) 4226,3529.31 4226,3824 4200.99,3849.01 4200.99,3901.99 4239,3940 4239,4122 4229,4132 ; 4161.11,3225.89 v1(4176,3211) ; v1(4708,5509) 4708,5522 IR8.3@4761,5575 ; IR8.3@4759.39,5572.73 4759.39,5458.61 4770,5448 J6.2@4770,5375 ; v1(5464,4484) v1(5464,4581)
  Top Layer w25: 3052,3044 ccw(c3252,3044) 3452,3044 ; 3052,3044 ccw(c3252,3044) 3452,3044 ; 3052,3044 ccw(c3252,3044) 3452,3044 ; 3052,3044 ccw(c3252,3044) 3452,3044 ; 3052,3044 ccw(c3252,3044) 3452,3044 ; 3052,3044 cw(c3252,3044) 3452,3044 ; 3052,3044 cw(c3252,3044) 3452,3044 ; 3052,3044 cw(c3252,3044) 3452,3044 ; 3052,3044 cw(c3252,3044) 3452,3044 ; 3052,3044 cw(c3252,3044) 3452,3044 ; 3052,3044 cw(c3252,3044) 3452,3044 ; 3052,3044 ccw(c3252,3044) 3452,3044 ; 3052,3044 ccw(c3252,3044) 3452,3044 ; 3052,3044 ccw(c3252,3044) 3452,3044 ; 3052,3044 cw(c3252,3044) 3452,3044 ; 3052,3044 ccw(c3252,3044) 3452,3044 ; 3052,3044 cw(c3252,3044) 3452,3044 ; 3052,3044 cw(c3252,3044) 3452,3044 ; 3452,3044 ccw(c3252,3044) 3452,3044 ; 3776,3047 ccw(c3976,3047) 4176,3047 ; 3776,3047 ccw(c3976,3047) 4176,3047 ; 3776,3047 ccw(c3976,3047) 4176,3047 ; 3776,3047 ccw(c3976,3047) 4176,3047 ; 3776,3047 ccw(c3976,3047) 4176,3047 ; 3776,3047 ccw(c3976,3047) 4176,3047 ; 3776,3047 ccw(c3976,3047) 4176,3047 ; 3776,3047 ccw(c3976,3047) 4176,3047 ; 3776,3047 ccw(c3976,3047) 4176,3047 ; 3776,3047 cw(c3976,3047) 4176,3047 ; 3776,3047 cw(c3976,3047) 4176,3047 ; 3776,3047 cw(c3976,3047) 4176,3047 ; 3776,3047 cw(c3976,3047) 4176,3047 ; 3776,3047 cw(c3976,3047) 4176,3047 ; 3776,3047 cw(c3976,3047) 4176,3047 ; 3776,3047 cw(c3976,3047) 4176,3047 ; 3776,3047 cw(c3976,3047) 4176,3047 ; 3776,3047 cw(c3976,3047) 4176,3047 ; 4176,3047 ccw(c3976,3047) 4176,3047 ; 4552,3044 ccw(c4752,3044) 4952,3044 ; 4552,3044 ccw(c4752,3044) 4952,3044 ; 4552,3044 ccw(c4752,3044) 4952,3044 ; 4552,3044 cw(c4752,3044) 4952,3044 ; 4552,3044 cw(c4752,3044) 4952,3044 ; 4552,3044 cw(c4752,3044) 4952,3044 ; 4552,3044 cw(c4752,3044) 4952,3044 ; 4552,3044 cw(c4752,3044) 4952,3044 ; 4552,3044 cw(c4752,3044) 4952,3044 ; 4552,3044 ccw(c4752,3044) 4952,3044 ; 4552,3044 ccw(c4752,3044) 4952,3044 ; 4552,3044 ccw(c4752,3044) 4952,3044 ; 4552,3044 ccw(c4752,3044) 4952,3044 ; 4552,3044 ccw(c4752,3044) 4952,3044 ; 4552,3044 ccw(c4752,3044) 4952,3044 ; 4552,3044 cw(c4752,3044) 4952,3044 ; 4552,3044 cw(c4752,3044) 4952,3044 ; 4552,3044 cw(c4752,3044) 4952,3044 ; 4952,3044 ccw(c4752,3044) 4952,3044
  Top Layer w30: 3452,3094 3776,3094 ; 4176,3094 4552,3094
  Bottom Layer w8: C17.2@2302.47,3368.19 2351,3416.72 2351,3425.12 IR3.3@2350.73,3425.39 ; C11.2@2345.84,4763.19 C11.2@2342.53,4763.19 IR2.3@2423.81,4763.19 ; IR2.3@2429,4760 2429,4979 R5.2@2470,5020 ; R5.2@2497,5020 2497,5030 2589,5122 2589,5267 ; 2589,5298 2589,5267 ; T2.2@2710,5356 2635,5356 2589,5310 2589,5267 ; T2.2@2712.36,5358.36 3008,5654 3140,5654 3238,5752 3323,5752 3375,5700 C10.2@3373.19,5697.53 3422.72,5648 IR1.3@3425.39,5649.27 3649.12,5873 3847,5873 3899,5925 4000,5925 4052,5873 4402,5873 4403,5872 ; v1(2763,2814) 2839.63,2814 3038,2615.63 3153.63,2615.63 3180,2642 3235.37,2642 3297,2580.37 3297,2486 IR4.3@3245,2434 ; v1@3122,4642 3133.49,4630.51 U5.16@3300.43,4630.51 U5.16@3300.43,4589 ; C23.2@3241.81,2347.53 IR4.3@3241.81,2425.81 ; v1(3658,3461) 3659,3460 C21.2@3694.44,3460 ; D17.1@3689,3573 D17.1@3691,3571 ; C14.2@3689.47,3510 3689.47,3460.53 3694.44,3465.5 C21.2@3694.44,3460 ; D17.1@3691,3570 D17.1@3691,3571 ; C21.2@3694.44,3456.44 C21.2@3694.44,3460 ; D17.1@3694.44,3567.56 D17.1@3691,3571 ; v1(3807.69,3726) 3771,3726 3691,3646 D17.1@3691,3571 ; U2.28@3949.16,3625.44 3949.16,3650.16 3958,3659 3958,3709 3967,3718 v1@3967,3727 ; v1(4049.69,3353) C20.2@4049.69,3390 ; T1.2@4050,5872 4403,5872 ; 4405,5872 4462,5815 ; C22.2@4425.69,4454 4433.08,4454 4433.08,4533.08 4481.8,4581.8 U4.20@4629.77,4581.8 v1(4738,4581.8) ; IR5.3@4582.28,2350.73 4582.28,2352 C24.2@4636.81,2297.47 ; 4607,5815 4517,5815 ; U4.8@4629.77,4345.57 4676,4345.57 4745.43,4415 v1@4771,4415 ; L4.2@4660.5,4955 4675.5,4955 4675.5,4933.75 4679.75,4929.5 4680.47,4929.5 4695.47,4914.5 4715.39,4914.5 4751.17,4878.72 4836,4878.72 C26.2@4836,4851.44 ; C12.2@4749.69,5665 4749.69,5579.31 4759,5570 4758.22,5572.34 4758,5573 4986,5573 5271.36,5287.64 T8.2@5358.36,5287.64 ; C12.2@4750,5672 4750,5748 4683,5815 4517,5815 ; v1@4752.3,4574.5 4816,4574.5 4833,4591.5 4833,4632 4820,4645 ; 4820,4646 4820,4685.89 4809.89,4696 U4.32@4809.89,4742.23 4809.89,4824.89 C26.2@4836,4851 ; U4.93@4829.57,4145.77 4829.57,4106.75 4840.32,4096 4840.32,4032 4851.45,4020.87 4867.45,4020.87 4891.47,3996.85 R34.1@4891.47,3976 4891.47,3959.5 4910.5,3959.5 4923.72,3946.28 4969.28,3946.28 4978.99,3956 4987,3956 5006.74,3975.74 5006.74,4018.25 5007,4018.51 5007,4077 ; 4835.5,4629.5 4884.5,4629.5 4911,4656 ; U4.36@4888.63,4742.23 4888.63,4681.37 4934,4636 4984.87,4636 4996.87,4648 ; v1@4985,4073 v1(4986,4074) 4989,4077 5007,4077 ; 4995,4646 5044.24,4695.24 ; v1@5023,4222 5027.38,4226.38 5052.38,4226.38 ; U4.83@5026.43,4145.77 U4.84@5006.74,4145.77 5006.74,4103.26 5007,4103 5007,4077 ; U4.44@5046.11,4742.23 5046.11,4688 v1(5137.11,4597) ; U4.81@5065.8,4145.77 5065.8,4184 ; 5066,4184 5066,4198.89 5052.38,4212.52 5052.38,4226.38 ; U4.56@5226.23,4581.8 v1@5284.41,4581.8 ; T6.2@5287.64,2641.64 5365.64,2641.64 5423,2699 ; v1(5350,3267) 5350,3229 v1@5418,3161 ; 5423,2707 5423,2699 ; v1@5463.75,4483.75 5481.25,4483.75 5582,4383 5582,4349 5563,4330 5428,4330 5406.44,4351.56 C27.2@5386,4351.56 5308.99,4351.56 5303,4345.57 U4.68@5226.23,4345.57 5060.57,4345.57 5055.5,4340.5 5055.5,4270.78 5057,4269.28 5057,4233.33 5052.38,4228.71 5052.38,4226.38 ; v1@5560,2921.04 5573,3239 5572,3239 5579.81,3246.81 C18.2@5637.47,3246.81 ; v1(5561,2921) v1@5561,2916 ; IR6.3@5569,3258 5593.6,3282.6 5593.6,3291 5569,3315.6 5569,3350.4 5593.6,3375 5595.74,3375 5607.27,3386.53 5607.27,3442.78 5618,3453.52 5618,3674 T7.2@5874,3930 ; v1@5616,3612 5619.5,3615.5 v1(5619,3616) ; C13.2@5695,4625.31 5649,4579.31 IR7.3@5649.27,4574.61 5898,4325.88 5898,4114 5934,4078 5934,4013 T7.2@5875,3954 ; T7.2@5872,3950 5874,3951 T7.2@5874,3933 ; 4403,5872 4460,5815 4462,5815 ; 4462,5815 4517,5815 ; 5423,2699 5423,2780 5559,2916 v1@5561,2916 ; v1@5561,2916 5561,2910 5573,2922 5560.99,2921.08 5560,2921 5560.8,2920.6 5570,2916 v1@5561,2916
  Bottom Layer w10: v1(2748,4324) 2781,4357 2781,4398 3057,4398 v1(3057,4316)
  Bottom Layer w20: v1@3056.5,4765.5 v1@3118,4827 ; v1(3124,4958) 3313,4958 3408,5053 3559,5053 3675,5169 3699,5169 ; J3.1@3349,4249 3390,4290 3830,4290 3892,4228 v1(3932,4228) ; J2.2@3695,5051 3695,4911 v1(3908,4911) ; J2.2@3700,5113 J2.1@3700,5250.02 ; J2.1@3700,5273 v1@3700,5333 ; v1@3770.32,5505 4773,5505 ; 4049.69,3333.31 v1@4174,3209 ; 4775.68,5505 4848,5505 5486.14,4866.86 5486.14,4802.14 5464,4780 v1(5464,4581) v1@5288,4581 ; R33.2@5381,4484.47 v1@5463.03,4484.47
  other v1: 5421,3160 3967,3728 4783,4427 3058,4765 3119,4825 3707,5335 3764,5508
5VUSB: J2.19 L5.2 U3.20 | length 5230.8
  Top Layer w8: v1(3443,3685) 3536,3685 3545,3694 3545,3745 3539,3751 3539,3939 3523,3955 3523,4202 3608,4287 3608,4719 3671,4782 v1@3671,4797 ; v1(3551,4864) 3551,4929 3577.5,4955.5 3577.5,5126.18 3570.68,5133 3553.67,5133 3525,5161.67 3525,5411 v1@3577,5463 ; L5.2@3606.5,2510 3606.5,2515 3613,2515 v1@3613,2464.5 ; v1(4159,5387) v1@4159,5541
  Bottom Layer w8: v1(3443,3685) 3083.5,3325.5 3048,3325.5 3037.5,3315 3037.5,3200 3069.5,3168 3228,3168 3260,3136 3260,2810 v1(3611,2459) ; v1@3551.5,4863.5 3585,4830 3635,4830 3666,4799 v1@3669,4799 ; v1@3575,5461 3575,5496 3630,5551 3674.28,5551 3678.78,5546.5 3703.22,5546.5 3707.72,5551 3782.28,5551 3806.28,5527 4070,5527 4082.64,5539.64 4083.78,5538.5 4108.22,5538.5 4110.72,5541 v1(4160,5541) ; v1@3610,2458 3716,2458 3741.5,2432.5 3838.13,2432.5 3873.63,2397 3945,2397 3945,2396.61 U3.20@3955.55,2396.61 ; J2.19@4150,5250.02 4150,5376 v1@4166,5392
  other v1: 3670,4797 3574,5461
CHRG: J2.15 R45.1 | length 3843.1
  Top Layer w8: R45.1@3370,2644.53 3434.53,2644.53 v1(3616,2826) ; v1(3515,3715) 3499.28,3730.72 3499.28,3753.65 3507,3761.37 3507,4208.63 3590,4291.63 3590,4861 3604,4875 3604,5128 3617,5141 3617,5369.28 3603.5,5382.78 3603.5,5466.5 v1(3691,5576) ; v1@3540,3463 3540,3211 v1(3616,3135) ; v1@4051,5350 v1(4051,5560)
  Bottom Layer w8: v1(3515,3715) 3540,3690 v1(3540,3464) ; v1(3616,2826) v1(3616,3135) ; v1(3691,5576) 3705,5590 3735.28,5590 3739.78,5585.5 3764.22,5585.5 3769.22,5590.5 4018.5,5590.5 v1@4047,5562 ; J2.15@4050,5299 v1(4050,5351)
CHRGEN: J2.12 U4.90 | length 1637.9
  Top Layer w8: v1@4258,4956 4275,4939 4275,4881 4415.5,4740.5 4415.5,4722.78 4433.78,4704.5 4451.5,4704.5 4573,4583 4613,4583 4640,4556 4640,4442 4749,4333 v1(4749,4249)
  Bottom Layer w8: J2.12@3946,5093 3946,4987 4008,4925 4129.28,4925 4136.78,4917.5 4161.22,4917.5 4179.72,4936 4244,4936 4258,4950 v1(4258,4955) ; v1(4749,4249) 4864,4249 4888.63,4224.37 U4.90@4888.63,4145.77
DREQ: J3.9 R24.2 | length 54.4
  Bottom Layer w8: J3.9@3338,3834 3350,3822 R24.2@3350,3784.53